# Altium PCB PyESPCar_Z1.PcbDoc
Units mil, origin at the board's own origin, x right, y up, seen from the top; angles counter-clockwise.
Board outline 3937.01 x 3937.01 mil, 2 copper layers (Top Layer, Bottom Layer); 38 components, 52 nets, 193 pads, 0 vias.
Unrouted connection lines stored in the file: 134.
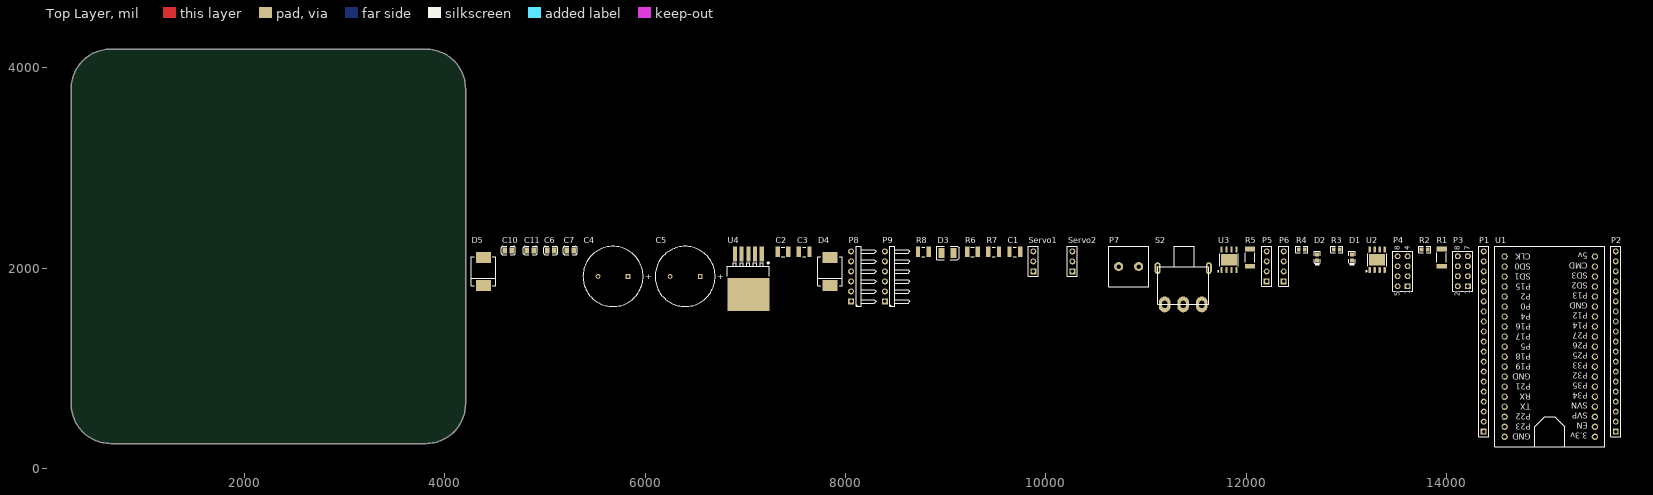
[diagram p0: Top Layer view]
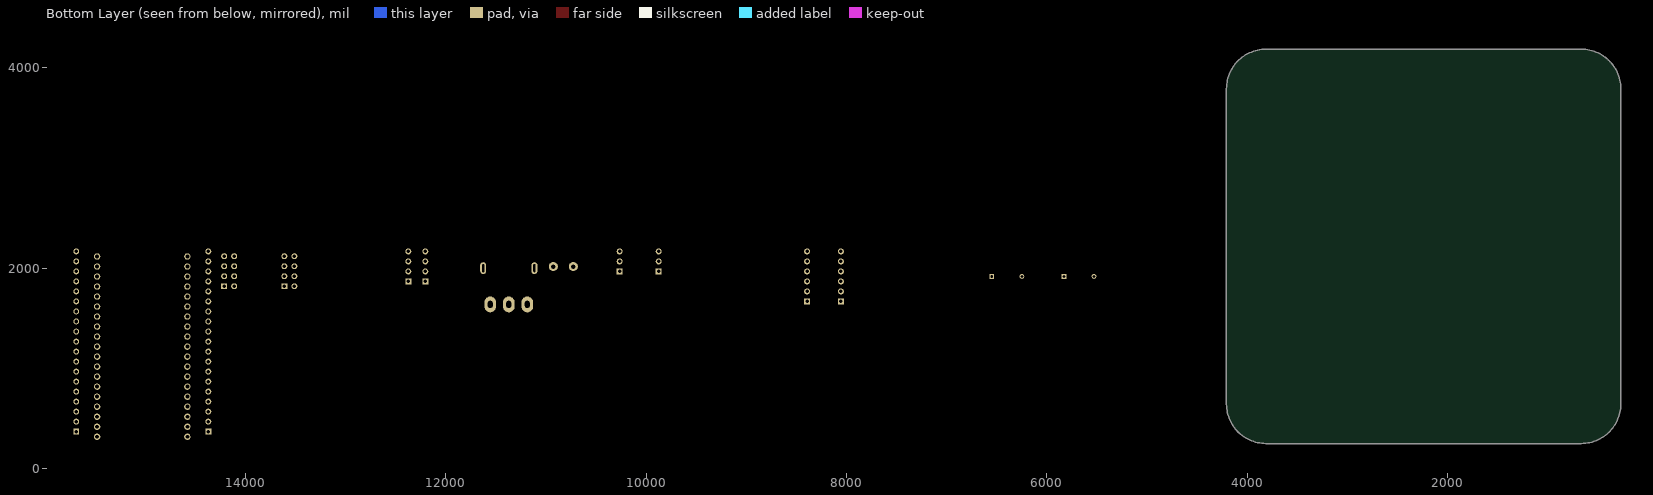
[diagram p1: Bottom Layer view, seen from below]

## Layer stack, top to bottom
Top Solder: solder mask 0.4, Solder Resist, Dk 3.5
Top Layer: signal copper 1.4
Dielectric1: core 12.6, FR-4, Dk 4.8
Bottom Layer: signal copper 1.4
Bottom Solder: solder mask 0.4, Solder Resist, Dk 3.5

## Board outline
662.2,249.5 cw(c662.2,643.2) 268.5,643.2 268.5,3792.8 cw(c662.2,3792.8) 662.2,4186.5 3811.8,4186.5 cw(c3811.8,3792.8) 4205.5,3792.8 4205.5,643.2 cw(c3811.8,643.2) 3811.8,249.5

## Design rules (kind name [scope] priority, off if disabled: settings)
Clearance [All] p1: gap=10 ignorepadtopadclearanceinfootprint=FALSE except(0: Arc-Hole Track-Hole SMDPad-Hole THPad-Hole Via-Hole Fill-Hole Poly-Hole Region-Hole Text-Hole)
HoleSize [All] p1: absolutevalues=TRUE maxlimit=200 minlimit=1 maxpercent=80.000 minpercent=20.000
PolygonConnect [All] p1: connectstyle=Relief reliefconductorwidth=10 reliefentries=4 polygonreliefangle="90 Angle" airgapwidth=10
RoomDefinition PyESPCar_Z1 [InComponentClass('PyESPCar_Z1')] p1: confinementstyle=ConfineIn formatcopy=TRUE lockcomponents=FALSE outline 4250.76,206.82 15763.76,206.82 15763.76,2326.82 4250.76,2326.82
RoutingVias [All] p1: holewidth=23.62 width=39.37 viastyle="Through Hole" minholewidth=1 minwidth=1 maxholewidth=28 maxwidth=50
SolderMaskExpansion [All] p1: expansion=4
Width [All] p1: maxlimit=60 minlimit=10 preferedwidth=50
29 further rules are at their usual default settings.

## Components (designator, comment, footprint, x,y, rotation, side; value= is the part's Value field where it differs from the comment)
C1 "Cap Semi" C1210 9690.76,2163.82 r0 top value=100nF
C2 "Cap Semi" C1210 7375.76,2163.82 r0 top value=0.1UF
C3 "Cap Semi" C1210 7587.76,2163.82 r0 top value=0.1UF
C4 "Cap Pol1" RB7.6-15 5678.76,1917.82 r0 top value=10uF
C5 "Cap Pol1" RB7.6-15 6398.76,1917.82 r0 top value=10uF
C6 "100nF(104) 10% 50V" 0805_C 5054.76,2176.82 r0 top
C7 "100nF(104) 10% 50V" 0805_C 5251.76,2176.82 r0 top
C10 "100nF(104) 10% 50V" 0805_C 4633.76,2176.82 r0 top
C11 "100nF(104) 10% 50V" 0805_C 4853.76,2176.82 r0 top
D1 "红灯 0603" 0603_LED_S1 13058.76,2106.82 r90 top
D2 "蓝灯 0603" 0603_LED_S1 12709.76,2106.82 r90 top
D3 "LED3" 3.5X2.8X1.9 9017.76,2150.82 r0 top
D4 "SS34" SMC(DO-214AB)_S1 7845.76,1968.82 r90 top
D5 "SS34" SMC(DO-214AB)_S1 4383.76,1968.82 r90 top
P1 "Header 19" HDR1X19 14372.76,367.82 r90 top
P2 "Header 19" HDR1X19 15691.76,367.82 r90 top
P3 "IIC" HDR2X4 14214.76,1819.82 r90 top
P4 "Header 4X2A" HDR2X4_CEN 13613.76,1819.82 r90 top
P5 "串口(拓展)" HDR1X4 12205.76,1867.82 r90 top
P6 "串口(拓展)" HDR1X4 12375.76,1867.82 r90 top
P7 "Header 2" HDR2X1_D1 10827.76,2016.82 r0 top
P8 "Header 6H" HDR1X6H 8055.76,1667.82 r90 top
P9 "Header 6H" HDR1X6H 8393.76,1667.82 r90 top
R1 "Res3" 12Z-2010 13953.76,2104.82 r90 top value=0.25Ω
R2 "1.5KΩ (1501) ±1%" 0603_R 13782.76,2185.82 r0 top
R3 "1.5KΩ (1501) ±1%" 0603_R 12905.76,2185.82 r0 top
R4 "1.5KΩ (1501) ±1%" 0603_R 12556.76,2185.82 r0 top
R5 "Res3" 12Z-2010 12038.76,2104.82 r90 top value=0.25Ω
R6 "Res3" 14-1210 9267.76,2163.82 r0 top value="1K 0.1%"
R7 "Res3" 14-1210 9479.76,2163.82 r0 top value="10K 0.1%"
R8 "Res3" 14-1210 8777.76,2163.82 r0 top value=1.5K
S2 "SW-SPDT" SW-3 11383.76,1856.82 r0 top
Servo1 "Header 3" HDR1X3 9875.76,1967.82 r90 top
Servo2 "Header 3" HDR1X3 10265.76,1967.82 r90 top
U1 "NodeMCU-32s" NodeMCU_ESP32 15032.76,1216.82 r90 top
U2 "A4950" SOP-8_EP_150mil 13308.76,2083.82 r0 top
U3 "A4950" SOP-8_EP_150mil 11829.76,2083.82 r0 top
U4 "LM2596T-5V(S)" TO-263-5 7029.76,2142.82 r90 top

## Footprints (in the part's own frame and the unit in brackets; to place one, negate y for a bottom-side part, rotate by r counter-clockwise, add the part's x,y. Pads: shape width x height; smd on the part's side, far side on the other; paste and mask are expansions set on the pad)
3.5X2.8X1.9 [mm] "SM LED; 2 C-Bend Leads; Body 3.5 x 2.8 x 1.9 mm, inc leads (LxWxH typ)"
  rect 1.5x2.6 smd: 1(-1.5,0) 2(1.5,0)
  silkscreen extent -2.65,-1.7 2.95,1.7
12Z-2010 [mm] "Chip Resistor, Body 5.0x2.5mm, IPC High Density"
  rect 1.2x2.6 smd: 1(-2.2,0) 2(2.2,0)
  silkscreen extent -1.2,-1.2 1.2,1.2, body extent -2.58,-1.33 2.58,1.33, height 0.9
14-1210 [mm] "Chip Resistor, Body 3.2x2.5mm, IPC High Density"
  rect 1.1x2.6 smd: 1(-1.35,0) 2(1.35,0)
  silkscreen extent -0.4,-1.2 0.4,1.2, body extent -1.68,-1.32 1.68,1.32, height 0.9
0603_LED_S1 [mm]
  rect 0.93x0.98 smd: A(0.77,0) K(-0.77,0)
  silkscreen extent -1.98,-0.79 1.54,0.79, body extent -0.8,-0.4 0.8,0.4, height 0.6
0603_R [mm]
  rect 0.93x0.98 smd: 1(-0.77,0) 2(0.77,0)
  silkscreen extent -1.53,-0.79 1.54,0.79, body extent -0.85,-0.4 0.85,0.4, height 0.56
0805_C [mm]
  rect 1.16x1.47 smd: 1(-0.89,0) 2(0.89,0)
  silkscreen extent -1.77,-1.04 1.77,1.04, body extent -1,-0.62 1,0.63, height 0.77
C1210 [mm] "Chip Capacitor, Body 3.2x2.5mm, IPC High Density"
  rect 1.1x2.6 smd: 1(-1.35,0) 2(1.35,0)
  silkscreen extent -0.4,-1.2 0.4,1.2, body extent -1.7,-1.35 1.7,1.35, height 1.3
HDR1X3 [mm] "Connector; Header; 3 Position"
  rect 1.5x1.5 hole 0.9: 1(0,0)
  round 1.5 hole 0.9: 2(2.54,0) 3(5.08,0)
  silkscreen extent -1.27,-1.27 6.35,1.27
HDR1X4 [mm] "Connector; Header; 4 Position"
  rect 1.5x1.5 hole 0.9: 1(0,0)
  round 1.5 hole 0.9: 2(2.54,0) 3(5.08,0) 4(7.62,0)
  silkscreen extent -1.27,-1.27 8.89,1.27
HDR1X6H [mm] "Connector; Header; 6 Position; Right Angle"
  rect 1.5x1.5 hole 0.9: 1(0,0)
  round 1.5 hole 0.9: 2(2.54,0) 3(5.08,0) 4(7.62,0) 5(10.16,0) 6(12.7,0)
  silkscreen extent -1.27,-6.35 13.97,-1.27
HDR1X19 [mm] "Connector; Header; 19 Position"
  rect 1.5x1.5 hole 0.9: 1(0,0)
  round 1.5 hole 0.9: 2(2.54,0) 3(5.08,0) 4(7.62,0) 5(10.16,0) 6(12.7,0) 7(15.24,0) 8(17.78,0) 9(20.32,0) 10(22.86,0) 11(25.4,0) 12(27.94,0) 13(30.48,0) 14(33.02,0) 15(35.56,0) 16(38.1,0) 17(40.64,0) 18(43.18,0) 19(45.72,0)
  silkscreen extent -1.27,-1.27 46.99,1.27
HDR2X1_D1 [mil] "5.08mm端子"
  round 90 hole 45: 1(-100,0) 2(100,0)
  silkscreen extent -200,-200 200,200
HDR2X4 [mm] "Connector; Header; 4x2 Position"
  rect 1.5x1.5 hole 0.9: 1(0,0)
  round 1.5 hole 0.9: 2(0,2.54) 3(2.54,0) 4(2.54,2.54) 5(5.08,0) 6(5.08,2.54) 7(7.62,0) 8(7.62,2.54)
  silkscreen extent -1.27,-1.27 8.89,3.81
HDR2X4_CEN [mm] "Connector; Header; 4x2 Position"
  rect 1.5x1.5 hole 0.9: 1(0,0)
  round 1.5 hole 0.9: 2(2.54,0) 3(5.08,0) 4(7.62,0) 5(0,2.54) 6(2.54,2.54) 7(5.08,2.54) 8(7.62,2.54)
  silkscreen extent -1.27,-1.27 8.89,3.81
NodeMCU_ESP32 [mm]
  round 1.6 hole 1: 0(-22.86,-11.43) 1(-20.32,-11.43) 2(-17.78,-11.43) 3(-15.24,-11.43) 4(-12.7,-11.43) 5(-10.16,-11.43) 6(-7.62,-11.43) 7(-5.08,-11.43) 8(-2.54,-11.43) 9(0,-11.43) 10(2.54,-11.43) 11(5.08,-11.43) 12(7.62,-11.43) 13(10.16,-11.43) 14(12.7,-11.43) 15(15.24,-11.43) 16(17.78,-11.43) 17(20.32,-11.43) 18(22.86,-11.43) 19(-22.86,11.43) 20(-20.32,11.43) 21(-17.78,11.43) 22(-15.24,11.43) 23(-12.7,11.43) 24(-10.16,11.43) 25(-7.62,11.43) 26(-5.08,11.43) 27(-2.54,11.43) 28(0,11.43) 29(2.54,11.43) 30(5.08,11.43) 31(7.62,11.43) 32(10.16,11.43) 33(12.7,11.43) 34(15.24,11.43) 35(17.78,11.43) 36(20.32,11.43) 37(22.86,11.43)
  silkscreen extent -25.4,-13.97 25.4,13.97
RB7.6-15 [mm] "Polarized Capacitor (Radial); 2 Leads"
  rect 1.2x1.2 hole 0.7: 1(3.81,0)
  round 1.2 hole 0.7: 2(-3.81,0)
  silkscreen extent -7.62,-7.62 7.62,7.62
SMC(DO-214AB)_S1 [mil]
  rect 110x150 smd: 1(140.49,0) 2(-140.49,0)
  silkscreen extent -146,-122 146,122
SOP-8_EP_150mil [mm]
  rect 4x2.9 smd: 0(0,0)
  oval 0.6x1.6 smd: 1(-1.905,-2.6) 2(-0.635,-2.6) 3(0.635,-2.6) 4(1.905,-2.6) 5(1.905,2.6) 6(0.635,2.6) 7(-0.635,2.6) 8(-1.905,2.6)
  silkscreen extent -2.85,-3.05 2.4,1.5
SW-3 [mm]
  oval 1.5x3 hole 0.5 slot 2 at 90 deg: 0(-6.784,3.649) 0(6.216,3.649)
  oval 3x4 hole 1.2 slot 1.8 at 90 deg: 1(-4.984,-5.551) 2(-0.284,-5.551) 3(4.416,-5.551)
  silkscreen extent -6.78,-5.55 6.22,9.22
TO-263-5 [mm]
  rect 8.4x10.65 smd: 0(-10.3,0)
  rect 3.8x1.05 smd: 1(0,-3.4) 2(0,-1.7) 3(0,0) 4(0,1.7) 5(0,3.4)
  silkscreen extent -5.65,-5.35 -2.1,5.35

## Part data
C1 C2 C3: "Capacitor (Semiconductor SIM Model)", LatestRevisionDate=29-May-2009, LatestRevisionNote="IPC-7351 Footprint Added.", PackageDescription="Chip Capacitor", PackageReference=C1206, Published=8-Jun-2000, Publisher="Altium Limited"
C4 C5: "Polarized Capacitor (Radial)", LatestRevisionDate=17-Jul-2002, LatestRevisionNote="Re-released for DXP Platform.", PackageDescription="Polarized Capacitor (Radial); 2 Leads", PackageReference=RB7.6-15, Published=8-Jun-2000, Publisher="Altium Limited"
C6 C7 C10 C11: library part "0805 100nF(104) 10% 50V", "贴片电容", Package=0805, SuppliersPartNumber=C49678, ComponentLink1Description=供应商链接, ComponentLink1URL=http://www.szlcsc.com/product/details_50686.html, Supplier=LC
D1: library part "0603 红灯", "发光二极管", Package=0603, SuppliersPartNumber=C2286, ComponentLink1Description=供应商链接, ComponentLink1URL=http://www.szlcsc.com/product/details_2659.html, Supplier=LC
D2: library part "0603 蓝灯", "发光二极管", Package=0603, SuppliersPartNumber=C72041, ComponentLink1Description=供应商链接, ComponentLink1URL=http://www.szlcsc.com/product/details_73150.html, Supplier=LC
D3: "Typical BLUE SiC LED", DatasheetVersion=16-Apr-2002, LatestRevisionDate=17-Dec-2003, LatestRevisionNote="PCB Footprint replaced.", PackageDescription="SM LED; 2 C-Bend Leads; Body 3.5 x 2.8 x 1.9 mm, inc leads (LxWxH typ)", PackageReference=3.5X2.8X1.9, PackageVersion=16-Apr-2002, Published=8-Jun-2000, Publisher="Altium Limited"
D4 D5: library part "SMC(DO-214AB) SS36-E3/57T", "二极管", Package=SMC(DO-214AB), SuppliersPartNumber=C35722, ComponentLink1Description=供应商链接, ComponentLink1URL=http://www.szlcsc.com/product/details_36698.html, Supplier=LC
P1 P2: "Header, 19-Pin", LatestRevisionDate=17-Jul-2002, LatestRevisionNote="Re-released for DXP Platform.", Publisher="Altium Limited"
P3: library part "Header 4X2", "Header, 4-Pin, Dual row", LatestRevisionDate=17-Jul-2002, LatestRevisionNote="Re-released for DXP Platform.", Publisher="Altium Limited"
P4: "Header, 4-Pin, Dual row", LatestRevisionDate=17-Jul-2002, LatestRevisionNote="Re-released for DXP Platform.", Publisher="Altium Limited"
P5 P6: library part "Header 4", "Header, 4-Pin", LatestRevisionDate=17-Jul-2002, LatestRevisionNote="Re-released for DXP Platform.", Publisher="Altium Limited"
P7: "Header, 2-Pin", LatestRevisionDate=17-Jul-2002, LatestRevisionNote="Re-released for DXP Platform.", Publisher="Altium Limited"
P8 P9: "Header, 6-Pin, Right Angle", LatestRevisionDate=17-Jul-2002, LatestRevisionNote="Re-released for DXP Platform.", Publisher="Altium Limited"
R1 R5 R6 R7 R8: "Resistor", LatestRevisionDate=29-May-2009, LatestRevisionNote="IPC-7351 Footprint Added.", PackageDescription="Chip Resistor", PackageReference=J1-0603, Published=8-Jun-2000, Publisher="Altium Limited"
R2 R3 R4: library part "0603 1.5KΩ (1501) 1%", "贴片电阻", Package=0603, SuppliersPartNumber=C22843, ComponentLink1Description=供应商链接, ComponentLink1URL=http://www.szlcsc.com/product/details_23570.html, Supplier=LC
S2: "SPDT Subminiature Toggle Switch, Right Angle Mounting, Vertical Actuation", ComponentLink1Description="Manufacturer Link", ComponentLink1URL=http://www.apem.com, DatasheetVersion=05-Dec-2000, LatestRevisionDate=17-Dec-2003, LatestRevisionNote="Schematic revised, PCB Footprint replaced.", PackageDescription="Switch; 4 Leads", PackageReference=TL36WW15050, Published=24-Mar-1999, Publisher="Altium Limited"
Servo1 Servo2: "Header, 3-Pin", LatestRevisionDate=17-Jul-2002, LatestRevisionNote="Re-released for DXP Platform.", Publisher="Altium Limited"

## Nets (pads, with @x,y where several pads share a name; then routed paths per layer and width w, separated by ;. In a path a pad name is that pad's centre, name@x,y a point inside that pad or via, vN(x,y) a via of type N, cw(c..) or ccw(c..) an arc to the next point about the centre after c; other vN are vias at no path point)
3.3v: P1.19 U1.0
3V3: C2.2 C3.2 C5.1 C7.2 D1.A D2.A P3.7 P4.5 P4.6 P8.5 P9.5
5V: C4.1 C6.2 C11.2 D4.1 P3.8 P4.7 P4.8 P5.4 P6.4 Servo1.2 Servo2.2 U2.4 U3.4 U4.4
5VIN: D4.2 P1.1 U1.18
12IN: P7.2 S2.2
12V: C10.2 S2.1 U4.1
ADC1_0: C1.2 P1.16 R6.2 R7.1 U1.3
AO1: P8.1 U2.6
AO2: P8.6 U2.8
BNT: P1.17 U1.2
BO1: P9.6 U3.8
BO2: P9.1 U3.6
CLK: P2.19 U1.37
CMD: P1.2 U1.17
GND: C1.1 C2.1 C3.1 C10.1 C11.1 D3.2 D5.1 P1.6 P2.1 P2.7 P3.1 P3.2 P4.1 P4.2 P4.3 P4.4 P5.1 P6.1 P7.1 P8.2 P9.2 R1.1 R2.1 R3.1 R5.1 R6.1 Servo1.3 Servo2.3 U1.13 U1.19 U1.25 U2.1 U3.1 U4.3 U4.5
LED: P2.15 R4.1 U1.33
NetC4_2: C4.2 C5.2 C6.1 C7.1
NetD1_K: D1.K R3.2
NetD2_K: D2.K R4.2
NetD3_1: D3.1 R8.1
NetD5_2: D5.2 U4.2
NetP1_18: P1.18 U1.1
NetR1_2: R1.2 U2.7
NetR5_2: R5.2 U3.7
P0: P2.14 U1.32
P4: P2.13 P8.4 U1.31
P5: P2.10 U1.28 U2.2
P12: P1.7 U1.12
P13: P1.5 U1.14
P14: P1.8 P9.3 U1.11
P15: P2.16 P8.3 U1.34
P16: P2.12 U1.30
P17: P2.11 U1.29 U2.3
P18: P2.9 U1.27 U3.3
P19: P2.8 U1.26 U3.2
P21: P2.6 U1.24
P22: P2.3 P3.5 P3.6 U1.21
P23: P2.2 P3.3 P3.4 U1.20
P25: P1.11 Servo1.1 U1.8
P26: P1.10 Servo2.1 U1.9
P27: P1.9 P9.4 U1.10
P32: P1.13 P6.3 U1.6
P33: P1.12 P6.2 U1.7
P34: P1.15 P5.3 U1.4
P35: P1.14 P5.2 U1.5
RX: P2.5 U1.23
SD0: P2.18 U1.36
SD1: P2.17 U1.35
SD2: P1.4 U1.15
SD3: P1.3 U1.16
TX: P2.4 U1.22
VM: R7.2 R8.2 U2.5 U3.5
pads on no net: R2.2 S2.0 S2.3 U2.0 U3.0 U4.0

## Text inside footprints (layer, text, board x,y; h text height)
C4: Top Overlay "+" at 5998.91,1888.81 h59.06
C5: Top Overlay "+" at 6718.91,1888.81 h59.06
P3: Top Overlay "2" at 14134.76,1719.82 h50 r90; Top Overlay "1" at 14234.76,1739.82 h50 r90; Top Overlay "7" at 14234.76,2179.82 h50 r90; Top Overlay "8" at 14134.76,2179.82 h50 r90
P4: Top Overlay "5" at 13533.76,1719.82 h50 r90; Top Overlay "1" at 13633.76,1739.82 h50 r90; Top Overlay "4" at 13633.76,2179.82 h50 r90; Top Overlay "8" at 13533.76,2179.82 h50 r90
U1: Top Overlay "CLK" at 14841.42,2146.35 h60 r180; Top Overlay "SD0" at 14841.42,2046.35 h60 r180; Top Overlay "SD1" at 14841.42,1946.35 h60 r180; Top Overlay "P15" at 14841.42,1846.35 h60 r180; Top Overlay "P2" at 14841.42,1746.35 h60 r180; Top Overlay "P0" at 14841.42,1646.35 h60 r180; Top Overlay "P4" at 14841.42,1546.35 h60 r180; Top Overlay "P16" at 14841.42,1446.35 h60 r180; Top Overlay "P17" at 14841.42,1346.35 h60 r180; Top Overlay "P5" at 14841.42,1246.35 h60 r180; Top Overlay "P18" at 14841.42,1146.35 h60 r180; Top Overlay "P19" at 14841.42,1046.35 h60 r180; Top Overlay "GND" at 14841.42,946.35 h60 r180; Top Overlay "P21" at 14841.42,846.35 h60 r180; Top Overlay "RX" at 14841.42,746.35 h60 r180; Top Overlay "TX" at 14841.42,646.35 h60 r180; Top Overlay "P22" at 14841.42,546.35 h60 r180; Top Overlay "P23" at 14841.42,446.35 h60 r180; Top Overlay "GND" at 14841.42,346.35 h60 r180; Top Overlay "EN" at 15414.25,456.19 h60 r180; Top Overlay "3.3v" at 15414.25,356.19 h60 r180; Top Overlay "SVP" at 15414.25,556.19 h60 r180; Top Overlay "SVN" at 15414.25,656.19 h60 r180; Top Overlay "P34" at 15414.25,756.19 h60 r180; Top Overlay "P35" at 15414.25,856.19 h60 r180; Top Overlay "P32" at 15414.25,956.19 h60 r180; Top Overlay "P33" at 15414.25,1056.19 h60 r180; Top Overlay "P25" at 15414.25,1156.19 h60 r180; Top Overlay "P26" at 15414.25,1256.19 h60 r180; Top Overlay "P27" at 15414.25,1356.19 h60 r180; Top Overlay "P14" at 15414.25,1456.19 h60 r180; Top Overlay "P12" at 15414.25,1556.19 h60 r180; Top Overlay "GND" at 15414.25,1656.19 h60 r180; Top Overlay "P13" at 15414.25,1756.19 h60 r180; Top Overlay "SD2" at 15414.25,1856.19 h60 r180; Top Overlay "SD3" at 15414.25,1956.19 h60 r180; Top Overlay "CMD" at 15414.25,2056.19 h60 r180; Top Overlay "5v" at 15414.25,2156.19 h60 r180